# EAGLE board CT_schematic (EAGLE 7.6.0)

Size 100 x 80 mm. Coordinates in mm from the lower left corner, seen from the top.
Outline: 0,0 100,0 100,80 0,80 0,0
Copper layers (1*16): Top 0.035mm / dielectric 1.5mm / Bottom 0.035mm
Design rules "default": minimum track width 10mil, minimum drill 24mil, track to track 8mil, track to pad 8mil, pad to pad 8mil, via to via 8mil, smd to smd 8mil, copper to edge 40mil, drill to drill 8mil, minimum pad ring 10mil, minimum via ring 8mil, stop-mask expansion 4mil, vias tented up to drill 0mil, thermal gap 10mil

## Footprints (pad centres in the part's own frame; a part is rotated, then mirrored left to right if it is on the bottom)
C0603 = smd 0.8 x 0.8: 1 -0.762,0; 2 0.762,0
C0402 = smd 0.5 x 0.5: 1 -0.508,0; 2 0.508,0
C0805 = smd 1.2 x 1.3: 1 -1.016,0; 2 1.016,0
C1210 = smd 1.2 x 2.5: 1 -1.524,0; 2 1.524,0
R0603 = smd 0.8 x 0.8: 1 -0.762,0; 2 0.762,0
EXV-9H = smd 3.505 x 1.676: 1 -2.857,0; 2 2.857,0
L0603 = smd 0.8 x 0.8: 1 -0.762,0; 2 0.762,0
L1210 = smd 1.2 x 2.5: 1 -1.524,0; 2 1.524,0
PJ-037B_PACKAGE = drill 3.7 square: 1 12,0 | drill 3.2 square: 2 6,0
TFBGA64 = smd 0.35 x 0.35: A1 -1.75,1.75; A2 -1.25,1.75; A3 -0.75,1.75; A4 -0.25,1.75; A5 0.25,1.75; A6 0.75,1.75; A7 1.25,1.75; A8 1.75,1.75; B1 -1.75,1.25; B2 -1.25,1.25; B3 -0.75,1.25; B4 -0.25,1.25; B5 0.25,1.25; B6 0.75,1.25; B7 1.25,1.25; B8 1.75,1.25; C1 -1.75,0.75; C2 -1.25,0.75; C3 -0.75,0.75; C4 -0.25,0.75; C5 0.25,0.75; C6 0.75,0.75; C7 1.25,0.75; C8 1.75,0.75; D1 -1.75,0.25; D2 -1.25,0.25; D3 -0.75,0.25; D4 -0.25,0.25; D5 0.25,0.25; D6 0.75,0.25; D7 1.25,0.25; D8 1.75,0.25; E1 -1.75,-0.25; E2 -1.25,-0.25; E3 -0.75,-0.25; E4 -0.25,-0.25; E5 0.25,-0.25; E6 0.75,-0.25; E7 1.25,-0.25; E8 1.75,-0.25; F1 -1.75,-0.75; F2 -1.25,-0.75; F3 -0.75,-0.75; F4 -0.25,-0.75; F5 0.25,-0.75; F6 0.75,-0.75; F7 1.25,-0.75; F8 1.75,-0.75; G1 -1.75,-1.25; G2 -1.25,-1.25; G3 -0.75,-1.25; G4 -0.25,-1.25; G5 0.25,-1.25; G6 0.75,-1.25; G7 1.25,-1.25; G8 1.75,-1.25; H1 -1.75,-1.75; H2 -1.25,-1.75; H3 -0.75,-1.75; H4 -0.25,-1.75; H5 0.25,-1.75; H6 0.75,-1.75; H7 1.25,-1.75; H8 1.75,-1.75
M41T65_QFN-16 = smd 0.775 x 0.305: 1 -1.387,0.75; 2 -1.387,0.25; 3 -1.387,-0.25; 4 -1.387,-0.75; 9 1.387,-0.75; 10 1.387,-0.25; 11 1.387,0.25; 12 1.387,0.75 | smd 0.305 x 0.775: 5 -0.75,-1.387; 6 -0.25,-1.387; 7 0.25,-1.387; 8 0.75,-1.387; 13 0.75,1.387; 14 0.25,1.387; 15 -0.25,1.387; 16 -0.75,1.387 | smd 1.6 x 1.6: 17 0,0
SSOP-20 = smd 1.651 x 0.432: 1 -3.48,2.925; 2 -3.48,2.275; 3 -3.48,1.625; 4 -3.48,0.975; 5 -3.48,0.325; 6 -3.48,-0.325; 7 -3.48,-0.975; 8 -3.48,-1.625; 9 -3.48,-2.275; 10 -3.48,-2.925; 11 3.48,-2.925; 12 3.48,-2.275; 13 3.48,-1.625; 14 3.48,-0.975; 15 3.48,-0.325; 16 3.48,0.325; 17 3.48,0.975; 18 3.48,1.625; 19 3.48,2.275; 20 3.48,2.925
182-009-MALE = drill 1.194 pad 1.524 octagon: 1 -5.537,10.923; 2 -2.769,10.923; 3 0,10.923; 4 2.769,10.923; 5 5.537,10.923; 6 -4.153,8.08; 7 -1.384,8.08; 8 1.384,8.08; 9 4.153,8.08 | hole 3.048: -12.446,9.501; 12.446,9.501
ATBTLC1000-MR110CA = smd 2 x 0.5: 1 -7.2,2.7; 2 -7.2,1.8; 3 -7.2,0.9; 4 -7.2,0; 5 -7.2,-0.9; 6 -7.2,-1.8; 7 -7.2,-2.7; 8 -7.2,-3.6; 17 3.6,-3.6; 18 3.6,-2.7; 19 3.6,-1.8; 20 3.6,-0.9; 21 3.6,0; 22 3.6,0.9; 23 3.6,1.8; 24 3.6,2.7 | smd 0.5 x 2: 9 -4.255,-6.824; 10 -3.355,-6.824; 11 -2.455,-6.824; 12 -1.555,-6.824; 13 -0.655,-6.824; 14 0.245,-6.824; 15 1.145,-6.824; 16 2.045,-6.824 | smd 2.7 x 2.7: 25 -1.261,-0.328
SI7034-A10-IM = smd 0.75 x 0.4: 1 -1,0.5; 2 -1,-0.5; 4 1,-0.5; 5 1,0.5 | smd 0.8 x 1.7: 3 0,0
ABS07-32.768KHZ-7-T = smd 1.1 x 2.4: 1 -2.5,0; 2 0,0
ASFL1 = smd 1.7 x 1.5: 1 -1.27,-1.1; 2 1.27,-1.1; 3 1.27,1.1; 4 -1.27,1.1
WSON-8 = smd 0.3 x 0.6: 1 -0.75,0; 2 0.05,0; 3 0.85,0; 4 1.65,0; 5 1.65,3.8; 6 0.85,3.8; 7 0.05,3.8; 8 -0.75,3.8 | smd 3 x 2.6: PAD 0.45,1.9
SON-6 = smd 0.55 x 0.3: 1 -0.355,0.5 | smd 0.52 x 0.3: 2 -0.37,0; 3 -0.37,-0.5; 4 0.37,-0.5; 5 0.37,0; 6 0.37,0.5
SW_4-1437565-2 = smd 1.4 x 2.1: 1 -2.23,4.55; 2 -2.23,-4.55; 3 2.23,4.55; 4 2.23,-4.55
LGM67K-G1J2-24-Z = smd 0.8 x 1.4: A -2,0; C 0,0
NC7SZ125M5X = smd 1.3 x 0.7: 1 -1.3,0.95; 2 -1.3,0; 3 -1.3,-0.95; 4 1.3,-0.95; 5 1.3,0.95

## Placement (x,y rotation side)
C1  1e-07  [C0603]  -43.18,68.58 0 top  (outside the outline)
C2  1e-07  [C0603]  -46.99,68.58 0 top  (outside the outline)
C3  1e-07  [C0603]  -50.8,68.58 0 top  (outside the outline)
C4  1e-07  [C0603]  -54.61,68.58 0 top  (outside the outline)
C5  4.7e-06  [C0603]  -39.37,68.58 0 top  (outside the outline)
C6  1e-07  [C0603]  -58.42,68.58 0 top  (outside the outline)
C7  1e-08  [C0603]  -62.23,68.58 0 top  (outside the outline)
C8  1e-06  [C0603]  -66.04,68.58 0 top  (outside the outline)
C9  1e-11  [C0402]  -57.15,73.66 0 top  (outside the outline)
C10  1e-11  [C0402]  -60.96,73.66 0 top  (outside the outline)
C11  4.7e-06  [C0805]  -53.34,55.88 0 top  (outside the outline)
C12  1e-06  [C0603]  -69.85,68.58 0 top  (outside the outline)
C13  1e-06  [C0603]  -73.66,68.58 0 top  (outside the outline)
C14  1e-06  [C0603]  -15.24,73.66 0 top  (outside the outline)
C15  4.7e-06  [C0805]  -58.42,55.88 0 top  (outside the outline)
C16  1e-05  [C0805]  -63.5,55.88 0 top  (outside the outline)
C17  1e-05  [C0805]  -68.58,55.88 0 top  (outside the outline)
C18  1e-07  [C0402]  -64.77,73.66 0 top  (outside the outline)
C19  1e-08  [C0402]  -68.58,73.66 0 top  (outside the outline)
C20  1e-08  [C0402]  -72.39,73.66 0 top  (outside the outline)
C21  1e-05  [C1210]  -29.21,57.15 0 top  (outside the outline)
C22  1e-05  [C0805]  -73.66,55.88 0 top  (outside the outline)
C23  8e-07  [R0603]  -19.05,73.66 0 top  (outside the outline)
C24  1e-05  [C1210]  -35.56,57.15 0 top  (outside the outline)
C25  1e-07  [C0402]  -76.2,73.66 0 top  (outside the outline)
C26  0.0001  [EXV-9H]  -17.78,49.53 0 top  (outside the outline)
C27  0.0001  [EXV-9H]  -29.21,49.53 0 top  (outside the outline)
C28  1e-08  [C0402]  -15.24,78.74 0 top  (outside the outline)
F1  240.0  [L0603]  -22.86,73.66 0 top  (outside the outline)
I1  1.5e-05  [L1210]  -41.91,57.15 0 top  (outside the outline)
J1  PJ-037B  [PJ-037B_PACKAGE]  -27.94,29.21 0 top  (outside the outline)
R2  1000.0  [R0603]  -26.67,73.66 0 top  (outside the outline)
R4  4700.0  [R0603]  -30.48,73.66 0 top  (outside the outline)
R5  2200.0  [R0603]  -34.29,73.66 0 top  (outside the outline)
R6  2200.0  [R0603]  -38.1,73.66 0 top  (outside the outline)
R7  2200.0  [R0603]  -41.91,73.66 0 top  (outside the outline)
R8  2200.0  [R0603]  -45.72,73.66 0 top  (outside the outline)
R9  10000.0  [R0603]  -62.23,63.5 0 top  (outside the outline)
R10  10000.0  [R0603]  -67.31,63.5 0 top  (outside the outline)
R11  10000.0  [R0603]  -72.39,63.5 0 top  (outside the outline)
R12  100000.0  [R0603]  -21.59,63.5 0 top  (outside the outline)
R13  100000.0  [R0603]  -26.67,63.5 0 top  (outside the outline)
R14  100000.0  [R0603]  -31.75,63.5 0 top  (outside the outline)
R15  10000.0  [R0603]  -15.24,68.58 0 top  (outside the outline)
R16  10000.0  [R0603]  -20.32,68.58 0 top  (outside the outline)
R17  100000.0  [R0603]  -36.83,63.5 0 top  (outside the outline)
R18  806.0  [R0603]  -49.53,73.66 0 top  (outside the outline)
R19  1000.0  [R0603]  -53.34,73.66 0 top  (outside the outline)
R20  100000.0  [R0603]  -41.91,63.5 0 top  (outside the outline)
R21  153694.38  [R0603]  -16.51,63.5 0 top  (outside the outline)
R22  100000.0  [R0603]  -46.99,63.5 0 top  (outside the outline)
R23  10000.0  [R0603]  -25.4,68.58 0 top  (outside the outline)
R24  10000.0  [R0603]  -30.48,68.58 0 top  (outside the outline)
R25  82000.0  [R0603]  -35.56,68.58 0 top  (outside the outline)
R26  300000.0  [R0603]  -52.07,63.5 0 top  (outside the outline)
R27  120000.0  [R0603]  -57.15,63.5 0 top  (outside the outline)
U1  STM32L152R6H6A  [TFBGA64]  -62.23,26.67 0 top  (outside the outline)
U2  M41T65Q6F  [M41T65_QFN-16]  -20.32,78.74 0 top  (outside the outline)
U3  MAX3218EAP+T  [SSOP-20]  -71.12,26.67 0 top  (outside the outline)
U4  182-009-113R531  [182-009-MALE]  -36.83,6.35 0 top  (outside the outline)
U5  ATBTLC1000-MR110CA  [ATBTLC1000-MR110CA]  -57.15,8.89 0 top  (outside the outline)
U6  Si7034-A10-IM  [SI7034-A10-IM]  -26.67,77.47 0 top  (outside the outline)
U7  ABS07-32.768KHZ-7-T  [ABS07-32.768KHZ-7-T]  -50.8,49.53 0 top  (outside the outline)
U8  ABS07-32.768KHZ-7-T  [ABS07-32.768KHZ-7-T]  -69.85,49.53 0 top  (outside the outline)
U9  ASFL1-25MHZ-NCS  [ASFL1]  -64.77,40.64 0 top  (outside the outline)
U10  LP3878SDX-ADJ/NOPB  [WSON-8]  -30.48,39.37 0 top  (outside the outline)
U11  LP2951ACSDX/NOPB  [WSON-8]  -48.26,39.37 0 top  (outside the outline)
U12  TPS3895ADRYR  [SON-6]  -30.48,77.47 0 top  (outside the outline)
U13  4-1437565-2  [SW_4-1437565-2]  -44.45,27.94 0 top  (outside the outline)
U14  Q65110A2395  [LGM67K-G1J2-24-Z]  -17.78,57.15 0 top  (outside the outline)
U15  nc7sz125m5x  [NC7SZ125M5X]  -46.99,55.88 0 top  (outside the outline)

## Library data of the parts
C1-C28 F1 I1 J1 R2 R4-R27 U1-U15 = circuit_tree

## Nets
CLK_CRYSTAL_U1_A1: C9.1 U1.A1 U8.1
CLK_CRYSTAL_U1_B1: C10.1 U1.B1 U8.2
CLK_CRYSTAL_U2_1: U2.1 U7.1
CLK_CRYSTAL_U2_2: U2.2 U7.2
CLK_U1_C1: U1.C1 U9.3
GND: C1.2 C2.2 C3.2 C4.2 C5.2 C6.2 C7.2 C8.2 C9.2 C10.2 C11.2 C12.2 C13.2 C14.2 C16.2 C17.2 C18.2 C19.2 C20.2 C21.2 C22.2 C23.2 C24.2 C25.2 C26.2 C27.2 C28.2 J1.2 R2.2 R9.2 R19.2 R22.2 R25.2 R27.2 U1.C2 U1.D4 U1.D5 U1.D6 U1.F1 U2.3 U2.5 U2.17 U3.5 U3.17 U3.20 U4.5 U5.1 U5.9 U5.13 U5.24 U5.25 U6.5 U9.2 U10.3 U10.PAD U11.3 U11.4 U11.PAD U12.2 U14.C U15.1 U15.3
NET_U1_A3: R6.1 U1.A3 U6.4
NET_U1_B2: C6.1 U1.B2
NET_U1_B3: R5.1 U1.B3 U6.2
NET_U1_B4: R9.1 U1.B4
NET_U1_E1: R4.1 U1.E1 U15.4
NET_U1_G7: R7.1 U1.G7 U2.10
NET_U1_H1: C7.1 C8.1 F1.1 U1.G1 U1.H1
NET_U1_H6: U14.A
NET_U1_H7: R8.1 U1.H7 U2.9
NET_U1_H8: U13.3 U13.4
NET_U2_4: R10.1 U2.4
NET_U2_11: R11.1 U2.11
NET_U3_1: I1.1 U3.1
NET_U3_2: R12.1 U3.2
NET_U3_3: R13.1 U3.3
NET_U3_4: R14.1 U3.4
NET_U3_15: C14.1 U3.15
NET_U3_16: C15.2 U3.16
NET_U3_18: C15.1 U3.18
NET_U3_19: C13.1 U3.19
NET_U4_2: U3.12 U4.2
NET_U4_3: U3.14 U4.3
NET_U4_7: U3.11 U4.7
NET_U4_8: U3.13 U4.8
NET_U5_17: R15.1 U5.17
NET_U5_20: R16.1 U5.20
NET_U10_1: C20.1 U10.1
NET_U10_6: R18.2 R19.1 U10.6
NET_U10_8: R17.1 U10.8
NET_U11_5: R20.1 U11.5
NET_U11_7: R21.2 R22.1 U11.7
NET_U12_1: R24.1 R25.1 U12.1
NET_U12_3: R26.2 R27.1 U12.3
NET_U12_4: R23.1 U12.4 U15.2
NET_U13_1: R2.1 U13.1 U13.2
PROC_SPI1_MISO: U1.A4 U5.14
PROC_SPI1_MOSI: U1.C4 U5.11
PROC_SPI1_NSS: U1.A6 U5.12
PROC_SPI1_SCK: U1.A5 U5.10
PROC_USART1_CTS: U1.C8 U3.8
PROC_USART1_RTS: U1.B8 U3.10
PROC_USART1_RX: U1.C3 U3.9
PROC_USART1_TX: U1.C7 U3.7
VCC_S1_15V4: C21.1 C23.1 C26.1 C27.1 J1.1 R17.2 U10.4 U11.8
VCC_TIER1_1V8: C1.1 C2.1 C3.1 C4.1 C5.1 C11.1 C12.1 C16.1 C17.1 C18.1 C22.1 C25.1 C28.1 F1.2 I1.2 R4.2 R5.2 R6.2 R7.2 R8.2 R10.2 R11.2 R12.2 R13.2 R14.2 R15.2 R16.2 R18.1 R23.2 R24.2 R26.1 U1.D2 U1.E4 U1.E5 U1.E6 U2.14 U3.6 U5.6 U5.22 U6.1 U10.5 U12.6 U15.5
VCC_TIER1_3V3: C19.1 C24.1 R20.2 R21.1 U9.4 U11.1

## Tracks (layer width: path | path; a pad name or v marks a point on that pad's centre or on a via)
CLK_CRYSTAL_U1_A1  (2 unrouted)
CLK_CRYSTAL_U1_B1  (2 unrouted)
CLK_CRYSTAL_U2_1  (1 unrouted)
CLK_CRYSTAL_U2_2  (1 unrouted)
CLK_U1_C1  (1 unrouted)
GND  (61 unrouted)
NET_U1_A3  (2 unrouted)
NET_U1_B2  (1 unrouted)
NET_U1_B3  (2 unrouted)
NET_U1_B4  (1 unrouted)
NET_U1_E1  (2 unrouted)
NET_U1_G7  (2 unrouted)
NET_U1_H1  (4 unrouted)
NET_U1_H7  (2 unrouted)
NET_U1_H8  (1 unrouted)
NET_U2_4  (1 unrouted)
NET_U2_11  (1 unrouted)
NET_U3_1  (1 unrouted)
NET_U3_2  (1 unrouted)
NET_U3_3  (1 unrouted)
NET_U3_4  (1 unrouted)
NET_U3_15  (1 unrouted)
NET_U3_16  (1 unrouted)
NET_U3_18  (1 unrouted)
NET_U3_19  (1 unrouted)
NET_U4_2  (1 unrouted)
NET_U4_3  (1 unrouted)
NET_U4_7  (1 unrouted)
NET_U4_8  (1 unrouted)
NET_U5_17  (1 unrouted)
NET_U5_20  (1 unrouted)
NET_U10_1  (1 unrouted)
NET_U10_6  (2 unrouted)
NET_U10_8  (1 unrouted)
NET_U11_5  (1 unrouted)
NET_U11_7  (2 unrouted)
NET_U12_1  (2 unrouted)
NET_U12_3  (2 unrouted)
NET_U12_4  (2 unrouted)
NET_U13_1  (2 unrouted)
PROC_SPI1_MISO  (1 unrouted)
PROC_SPI1_MOSI  (1 unrouted)
PROC_SPI1_NSS  (1 unrouted)
PROC_SPI1_SCK  (1 unrouted)
PROC_USART1_CTS  (1 unrouted)
PROC_USART1_RTS  (1 unrouted)
PROC_USART1_RX  (1 unrouted)
PROC_USART1_TX  (1 unrouted)
VCC_S1_15V4  (7 unrouted)
VCC_TIER1_1V8  (42 unrouted)
VCC_TIER1_3V3  (5 unrouted)